# Altium PCB B.PcbDoc
Units mm, origin at the board's own origin, x right, y up, seen from the top; angles counter-clockwise.
Board outline 93 x 32 mm, 2 copper layers (Top Layer, Bottom Layer); 2 components, 64 nets, 128 pads, 0 vias.
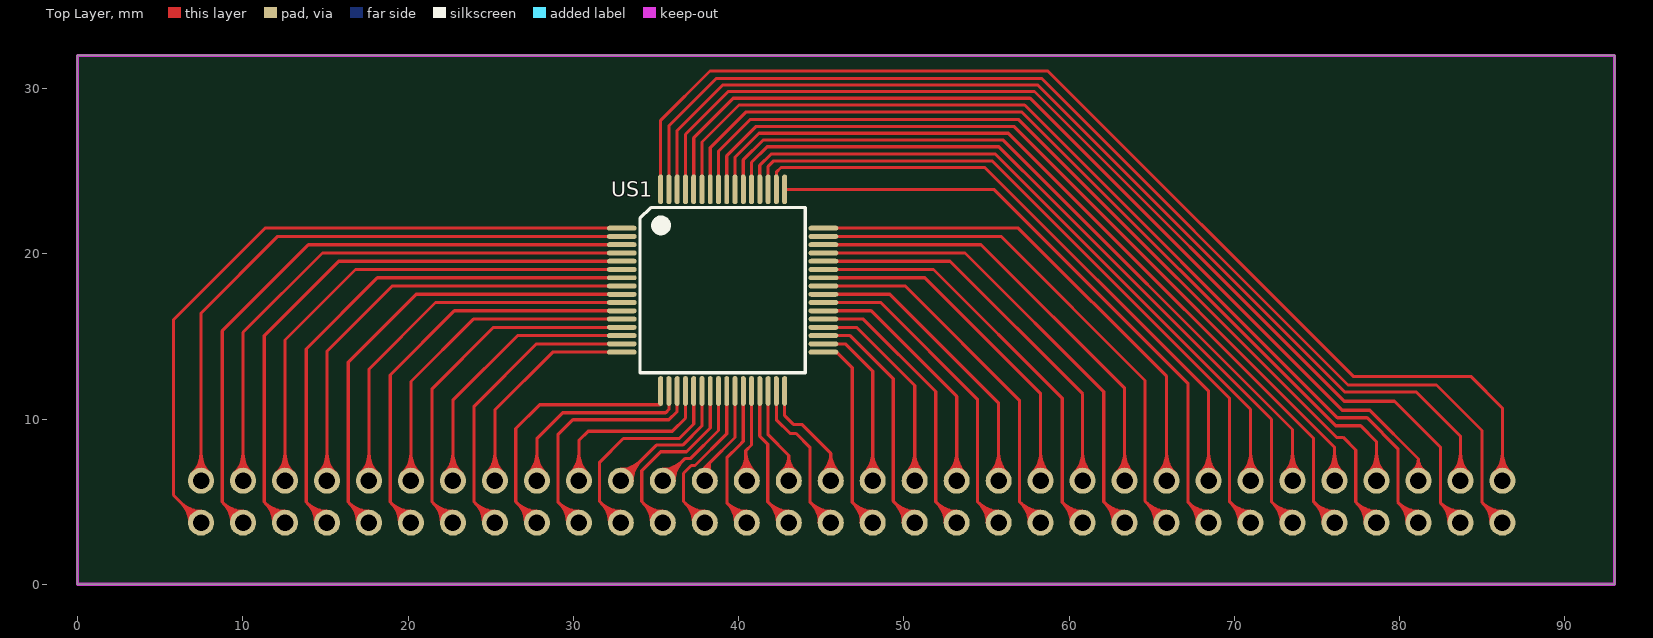
[diagram p0: Top Layer view]
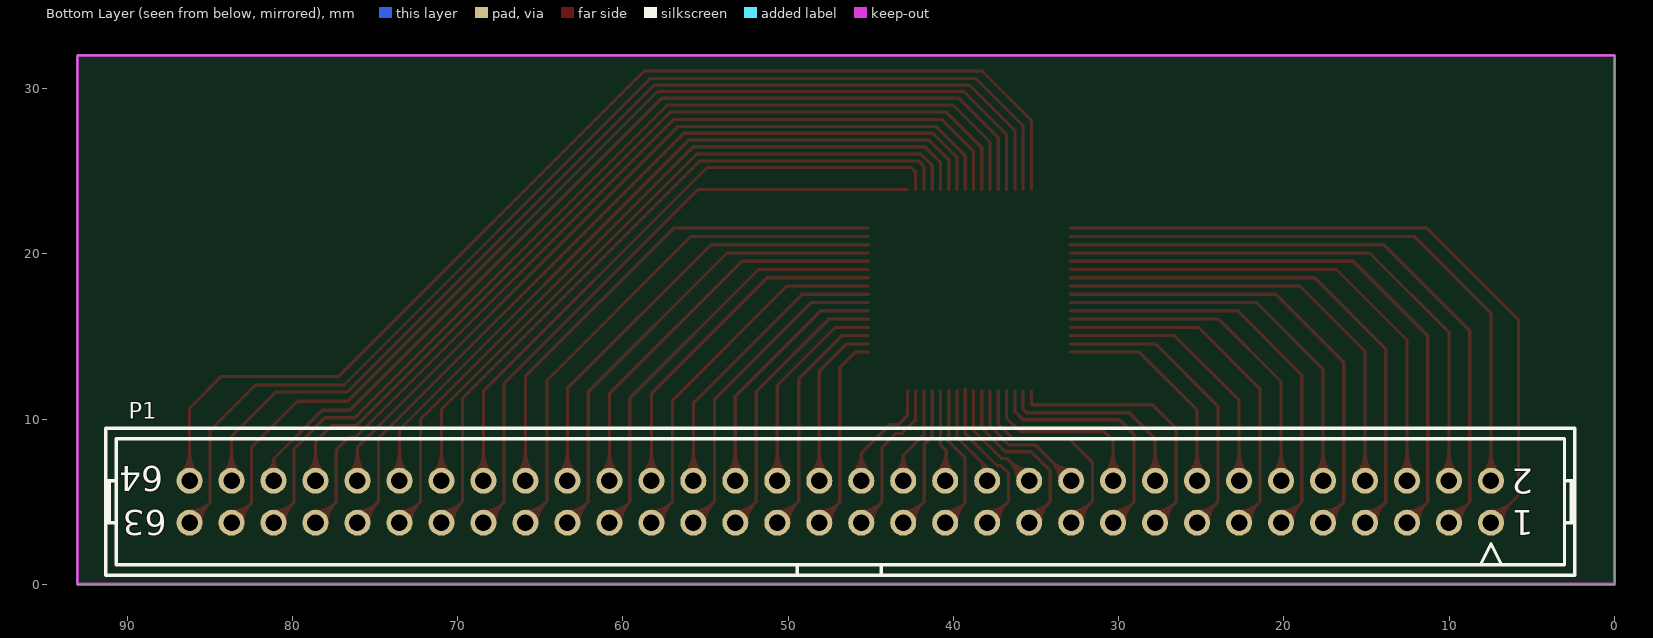
[diagram p1: Bottom Layer view, seen from below]

## Layer stack, top to bottom
Top Layer: signal copper 0.0356
Dielectric: dielectric 0.32, FR-4, Dk 4.8
Bottom Layer: signal copper 0.0356

## Board outline
0,0 0,32 93,32 93,0

## Design rules (kind name [scope] priority, off if disabled: settings)
Clearance Clearance_1 [inpolygon] p1: gap=0.5
Clearance [All] p2: gap=0.2
MinimumSolderMaskSliver [All] p1: minsoldermaskwidth=0.01
PolygonConnect PolygonConnect_1 [isvia] p1: connectstyle=Direct reliefconductorwidth=0.254 reliefentries=4 polygonreliefangle="90 Angle"
PolygonConnect [All] p2: connectstyle=Relief reliefconductorwidth=0.254 reliefentries=4 polygonreliefangle="90 Angle"
RoutingVias [All] p1: holewidth=0.3 width=0.66 viastyle="Through Hole" minholewidth=0.3 minwidth=0.66 maxholewidth=0.3 maxwidth=0.66
SilkToSilkClearance [All] p1: silktosilkclearance=0.01
SilkscreenOverComponentPads [All] p1: minsilkscreentomaskgap=0.01
SolderMaskExpansion [All] p1: expansion=0.102
Width [All] p1: maxlimit=1 minlimit=0.15 preferedwidth=0.254 minimp=50.000000 maximp=50.000000 favimp=50.000000
25 further rules are at their usual default settings.

## Components (designator, comment, footprint, x,y, rotation, side; value= is the part's Value field where it differs from the comment)
P1 "64" 64-1 46.847,5 r0 bottom locked
US1 "64" TQFP64 39.036,17.8 r0 top locked

## Footprints (in the part's own frame and the unit in brackets; to place one, negate y for a bottom-side part, rotate by r counter-clockwise, add the part's x,y. Pads: shape width x height; smd on the part's side, far side on the other; paste and mask are expansions set on the pad)
64-1 [mil]
  round 62 hole 39.37: 1(-1550,50) 2(-1550,-50) 3(-1450,50) 4(-1450,-50) 5(-1350,50) 6(-1350,-50) 7(-1250,50) 8(-1250,-50) 9(-1150,50) 10(-1150,-50) 11(-1050,50) 12(-1050,-50) 13(-950,50) 14(-950,-50) 15(-850,50) 16(-850,-50) 17(-750,50) 18(-750,-50) 19(-650,50) 20(-650,-50) 21(-550,50) 22(-550,-50) 23(-450,50) 24(-450,-50) 25(-350,50) 26(-350,-50) 27(-250,50) 28(-250,-50) 29(-150,50) 30(-150,-50) 31(-50,50) 32(-50,-50) 33(50,50) 34(50,-50) 35(150,50) 36(150,-50) 37(250,50) 38(250,-50) 39(350,50) 40(350,-50) 41(450,50) 42(450,-50) 43(550,50) 44(550,-50) 45(650,50) 46(650,-50) 47(750,50) 48(750,-50) 49(850,50) 50(850,-50) 51(950,50) 52(950,-50) 53(1050,50) 54(1050,-50) 55(1150,50) 56(1150,-50) 57(1250,50) 58(1250,-50) 59(1350,50) 60(1350,-50) 61(1450,50) 62(1450,-50) 63(1550,50) 64(1550,-50)
  silkscreen extent -1750,-175 1750,175
TQFP64 [mm]
  oval 1.8x0.3 smd mask+0.05: 1(-6.1,3.75) 2(-6.1,3.25) 3(-6.1,2.75) 4(-6.1,2.25) 5(-6.1,1.75) 6(-6.1,1.25) 7(-6.1,0.75) 8(-6.1,0.25) 9(-6.1,-0.25) 10(-6.1,-0.75) 11(-6.1,-1.25) 12(-6.1,-1.75) 13(-6.1,-2.25) 14(-6.1,-2.75) 15(-6.1,-3.25) 16(-6.1,-3.75) 33(6.1,-3.75) 34(6.1,-3.25) 35(6.1,-2.75) 36(6.1,-2.25) 37(6.1,-1.75) 38(6.1,-1.25) 39(6.1,-0.75) 40(6.1,-0.25) 41(6.1,0.25) 42(6.1,0.75) 43(6.1,1.25) 44(6.1,1.75) 45(6.1,2.25) 46(6.1,2.75) 47(6.1,3.25) 48(6.1,3.75)
  oval 0.3x1.8 smd mask+0.05: 17(-3.75,-6.1) 18(-3.25,-6.1) 19(-2.75,-6.1) 20(-2.25,-6.1) 21(-1.75,-6.1) 22(-1.25,-6.1) 23(-0.75,-6.1) 24(-0.25,-6.1) 25(0.25,-6.1) 26(0.75,-6.1) 27(1.25,-6.1) 28(1.75,-6.1) 29(2.25,-6.1) 30(2.75,-6.1) 31(3.25,-6.1) 32(3.75,-6.1) 49(3.75,6.1) 50(3.25,6.1) 51(2.75,6.1) 52(2.25,6.1) 53(1.75,6.1) 54(1.25,6.1) 55(0.75,6.1) 56(0.25,6.1) 57(-0.25,6.1) 58(-0.75,6.1) 59(-1.25,6.1) 60(-1.75,6.1) 61(-2.25,6.1) 62(-2.75,6.1) 63(-3.25,6.1) 64(-3.75,6.1)
  silkscreen extent -5,-5 5,5

## Nets (pads, with @x,y where several pads share a name; then routed paths per layer and width w, separated by ;. In a path a pad name is that pad's centre, name@x,y a point inside that pad or via, vN(x,y) a via of type N, cw(c..) or ccw(c..) an arc to the next point about the centre after c; other vN are vias at no path point)
1: P1.1 US1.1 | length 46.9
  Top Layer w0.19: P1.1@6.785,3.73 ccw(c5.113,3.73) 6.295,4.912 ccw(c7.477,6.094) P1.1@7.477,4.422 ; P1.1@6.975,3.73 ccw(c5.762,3.73) 6.62,4.588 ccw(c7.477,5.445) P1.1@7.477,4.232 ; P1.1 5.808,5.399 5.808,16.007 11.351,21.55 US1.1
2: P1.2 US1.2 | length 42
  Top Layer w0.19: P1.2@6.988,6.76 ccw(c5.806,7.942) 7.477,7.942 ccw(c9.149,7.942) P1.2@7.967,6.76 ; P1.2@7.122,6.625 ccw(c6.264,7.483) 7.477,7.483 ccw(c8.69,7.483) P1.2@7.833,6.625 ; P1.2 7.477,16.407 12.121,21.05 US1.2
3: P1.3 US1.3 | length 43
  Top Layer w0.19: P1.3@9.325,3.73 ccw(c7.653,3.73) 8.835,4.912 ccw(c10.017,6.094) P1.3@10.017,4.422 ; P1.3@9.515,3.73 ccw(c8.302,3.73) 9.16,4.588 ccw(c10.017,5.445) P1.3@10.017,4.232 ; P1.3 8.761,4.986 8.761,15.337 13.975,20.55 US1.3
4: P1.4 US1.4 | length 38.4
  Top Layer w0.19: P1.4@9.528,6.76 ccw(c8.346,7.942) 10.017,7.942 ccw(c11.689,7.942) P1.4@10.507,6.76 ; P1.4@9.662,6.625 ccw(c8.804,7.483) 10.017,7.483 ccw(c11.23,7.483) P1.4@10.373,6.625 ; P1.4 10.017,15.243 14.824,20.05 US1.4
5: P1.5 US1.5 | length 39.9
  Top Layer w0.19: P1.5@11.865,3.73 ccw(c10.193,3.73) 11.375,4.912 ccw(c12.557,6.094) P1.5@12.557,4.422 ; P1.5@12.055,3.73 ccw(c10.842,3.73) 11.7,4.588 ccw(c12.557,5.445) P1.5@12.557,4.232 ; P1.5 11.301,4.986 11.301,15.049 15.802,19.55 US1.5
6: P1.6 US1.6 | length 35.2
  Top Layer w0.19: P1.6@12.068,6.76 ccw(c10.886,7.942) 12.557,7.942 ccw(c14.229,7.942) P1.6@13.047,6.76 ; P1.6@12.202,6.625 ccw(c11.344,7.483) 12.557,7.483 ccw(c13.77,7.483) P1.6@12.913,6.625 ; P1.6 12.557,14.781 16.826,19.05 US1.6
7: P1.7 US1.7 | length 36.4
  Top Layer w0.19: P1.7@14.405,3.73 ccw(c12.733,3.73) 13.915,4.912 ccw(c15.097,6.094) P1.7@15.097,4.422 ; P1.7@14.595,3.73 ccw(c13.382,3.73) 14.24,4.588 ccw(c15.097,5.445) P1.7@15.097,4.232 ; P1.7 13.841,4.986 13.841,14.243 18.148,18.55 US1.7
8: P1.8 US1.8 | length 31.8
  Top Layer w0.19: P1.8@14.608,6.76 ccw(c13.426,7.942) 15.097,7.942 ccw(c16.769,7.942) P1.8@15.587,6.76 ; P1.8@14.742,6.625 ccw(c13.884,7.483) 15.097,7.483 ccw(c16.31,7.483) P1.8@15.453,6.625 ; P1.8 15.097,14.101 19.046,18.05 US1.8
9: P1.9 US1.9 | length 33
  Top Layer w0.19: P1.9@16.945,3.73 ccw(c15.273,3.73) 16.455,4.912 ccw(c17.637,6.094) P1.9@17.637,4.422 ; P1.9@17.135,3.73 ccw(c15.922,3.73) 16.78,4.588 ccw(c17.637,5.445) P1.9@17.637,4.232 ; P1.9 16.381,4.986 16.381,13.438 20.494,17.55 US1.9
10: P1.10 US1.10 | length 28.2
  Top Layer w0.19: P1.10@17.148,6.76 ccw(c15.966,7.942) 17.637,7.942 ccw(c19.309,7.942) P1.10@18.127,6.76 ; P1.10@17.282,6.625 ccw(c16.424,7.483) 17.637,7.483 ccw(c18.85,7.483) P1.10@17.993,6.625 ; P1.10 17.637,13.021 21.666,17.05 US1.10
11: P1.11 US1.11 | length 29.6
  Top Layer w0.19: P1.11@19.485,3.73 ccw(c17.813,3.73) 18.995,4.912 ccw(c20.177,6.094) P1.11@20.177,4.422 ; P1.11@19.675,3.73 ccw(c18.462,3.73) 19.32,4.588 ccw(c20.177,5.445) P1.11@20.177,4.232 ; P1.11 18.921,4.986 18.921,12.666 22.805,16.55 US1.11
12: P1.12 US1.12 | length 24.9
  Top Layer w0.19: P1.12@19.688,6.76 ccw(c18.506,7.942) 20.177,7.942 ccw(c21.849,7.942) P1.12@20.667,6.76 ; P1.12@19.822,6.625 ccw(c18.964,7.483) 20.177,7.483 ccw(c21.39,7.483) P1.12@20.533,6.625 ; P1.12 20.177,12.273 23.955,16.05 US1.12
13: P1.13 US1.13 | length 26.2
  Top Layer w0.19: P1.13@22.025,3.73 ccw(c20.353,3.73) 21.535,4.912 ccw(c22.717,6.094) P1.13@22.717,4.422 ; P1.13@22.215,3.73 ccw(c21.002,3.73) 21.86,4.588 ccw(c22.717,5.445) P1.13@22.717,4.232 ; P1.13 21.461,4.986 21.461,11.838 25.173,15.55 US1.13
14: P1.14 US1.14 | length 21.2
  Top Layer w0.19: P1.14@22.228,6.76 ccw(c21.046,7.942) 22.717,7.942 ccw(c24.389,7.942) P1.14@23.207,6.76 ; P1.14@22.362,6.625 ccw(c21.504,7.483) 22.717,7.483 ccw(c23.93,7.483) P1.14@23.073,6.625 ; P1.14 22.717,11.146 26.621,15.05 US1.14
15: P1.15 US1.15 | length 22.6
  Top Layer w0.19: P1.15@24.565,3.73 ccw(c22.893,3.73) 24.075,4.912 ccw(c25.257,6.094) P1.15@25.257,4.422 ; P1.15@24.755,3.73 ccw(c23.542,3.73) 24.4,4.588 ccw(c25.257,5.445) P1.15@25.257,4.232 ; P1.15 24.001,4.986 24.001,10.78 27.771,14.55 US1.15
16: P1.16 US1.16 | length 17.9
  Top Layer w0.19: P1.16@24.768,6.76 ccw(c23.586,7.942) 25.257,7.942 ccw(c26.929,7.942) P1.16@25.747,6.76 ; P1.16@24.902,6.625 ccw(c24.044,7.483) 25.257,7.483 ccw(c26.47,7.483) P1.16@25.613,6.625 ; P1.16 25.257,10.547 28.76,14.05 US1.16
17: P1.17 US1.17 | length 20.9
  Top Layer w0.19: P1.17@27.105,3.73 ccw(c25.433,3.73) 26.615,4.912 ccw(c27.797,6.094) P1.17@27.797,4.422 ; P1.17@27.295,3.73 ccw(c26.082,3.73) 26.94,4.588 ccw(c27.797,5.445) P1.17@27.797,4.232 ; P1.17 26.522,5.006 26.522,9.428 27.962,10.868 35.235,10.868 35.286,10.918 US1.17
18: P1.18 US1.18 | length 16.9
  Top Layer w0.19: P1.18@27.308,6.76 ccw(c26.126,7.942) 27.797,7.942 ccw(c29.469,7.942) P1.18@28.287,6.76 ; P1.18@27.442,6.625 ccw(c26.584,7.483) 27.797,7.483 ccw(c29.01,7.483) P1.18@28.153,6.625 ; P1.18 27.797,8.813 29.363,10.379 35.586,10.379 35.786,10.579 US1.18
19: P1.19 US1.19 | length 19.4
  Top Layer w0.19: P1.19@29.645,3.73 ccw(c27.973,3.73) 29.155,4.912 ccw(c30.337,6.094) P1.19@30.337,4.422 ; P1.19@29.835,3.73 ccw(c28.622,3.73) 29.48,4.588 ccw(c30.337,5.445) P1.19@30.337,4.232 ; P1.19 29.066,5.001 29.066,9.047 29.978,9.958 35.786,9.958 36.286,10.458 US1.19
20: P1.20 US1.20 | length 15.6
  Top Layer w0.19: P1.20@29.848,6.76 ccw(c28.666,7.942) 30.337,7.942 ccw(c32.009,7.942) P1.20@30.827,6.76 ; P1.20@29.982,6.625 ccw(c29.124,7.483) 30.337,7.483 ccw(c31.55,7.483) P1.20@30.693,6.625 ; P1.20 30.337,8.707 30.896,9.266 35.997,9.266 36.786,10.054 US1.20
21: P1.21 US1.21 | length 17.4
  Top Layer w0.19: P1.21@32.185,3.73 ccw(c30.513,3.73) 31.695,4.912 ccw(c32.877,6.094) P1.21@32.877,4.422 ; P1.21@32.375,3.73 ccw(c31.162,3.73) 32.02,4.588 ccw(c32.877,5.445) P1.21@32.877,4.232 ; P1.21 31.596,5.011 31.596,7.391 33.029,8.824 36.407,8.824 37.286,9.702 US1.21
22: P1.22 US1.22 | length 12.9
  Top Layer w0.19: P1.22 35.028,8.421 36.613,8.421 37.786,9.594 US1.22 ; P1.22@32.877,6.772 ccw(c32.877,7.985) 33.735,7.128 ccw(c34.593,6.27) P1.22@33.38,6.27 ; P1.22@32.877,6.962 ccw(c32.877,8.634) 34.059,7.452 ccw(c35.241,6.27) P1.22@33.57,6.27
23: P1.23 US1.23 | length 15.7
  Top Layer w0.19: P1.23@34.725,3.73 ccw(c33.053,3.73) 34.235,4.912 ccw(c35.417,6.094) P1.23@35.417,4.422 ; P1.23@34.915,3.73 ccw(c33.702,3.73) 34.56,4.588 ccw(c35.417,5.445) P1.23@35.417,4.232 ; P1.23 34.138,5.009 34.138,6.874 35.286,8.022 36.847,8.022 38.286,9.46 US1.23
24: P1.24 US1.24 | length 11.5
  Top Layer w0.19: P1.24 36.755,7.607 37.083,7.607 38.786,9.31 US1.24 ; P1.24@35.417,6.772 ccw(c35.417,7.985) 36.275,7.128 ccw(c37.133,6.27) P1.24@35.92,6.27 ; P1.24@35.417,6.962 ccw(c35.417,8.634) 36.599,7.452 ccw(c37.781,6.27) P1.24@36.11,6.27
25: P1.25 US1.25 | length 14.5
  Top Layer w0.19: P1.25@37.265,3.73 ccw(c35.593,3.73) 36.775,4.912 ccw(c37.957,6.094) P1.25@37.957,4.422 ; P1.25@37.455,3.73 ccw(c36.242,3.73) 37.1,4.588 ccw(c37.957,5.445) P1.25@37.957,4.232 ; P1.25 36.672,5.015 36.672,6.713 37.146,7.188 37.364,7.188 39.284,9.108 39.284,11.846 39.286,11.844 US1.25
26: P1.26 US1.26 | length 8.5
  Top Layer w0.19: P1.26@37.868,6.957 ccw(c37.854,7.059) 37.957,7.059 ; P1.26@38.047,6.957 cw(c38.06,7.059) 37.957,7.059 ; US1.26 39.786,8.887 38.247,7.348 ; 37.957,7.059 P1.26 P1.26@38.113,6.426 ; 37.957,7.059 38.113,7.215 ; P1.26@38.113,6.426 38.113,7.215 ; P1.26@38.113,6.426 38.247,6.559 38.247,7.348 ; 38.113,7.215 38.247,7.348
27: P1.27 US1.27 | length 13.4
  Top Layer w0.19: P1.27@39.805,3.73 ccw(c38.133,3.73) 39.315,4.912 ccw(c40.497,6.094) P1.27@40.497,4.422 ; P1.27@39.995,3.73 ccw(c38.782,3.73) 39.64,4.588 ccw(c40.497,5.445) P1.27@40.497,4.232 ; US1.27 40.286,8.65 40.036,8.4 39.296,7.66 39.296,4.931 P1.27
28: P1.28 US1.28 | length 10.9
  Top Layer w0.19: P1.28@40.008,6.76 ccw(c38.974,7.793) 40.436,7.793 ; P1.28@40.142,6.625 ccw(c39.433,7.334) 40.436,7.334 ; 40.436,7.173 ccw(c41.4,7.173) P1.28@40.718,6.491 ; 40.436,7.632 ccw(c41.859,7.632) P1.28@40.853,6.625 ; 40.436,8.09 ccw(c42.318,8.09) P1.28@40.987,6.76 ; P1.28 40.436,6.332 40.436,8.079 40.786,8.429 US1.28
29: P1.29 US1.29 | length 13.2
  Top Layer w0.19: US1.29 41.286,8.967 41.767,8.486 41.767,5.001 P1.29 ; P1.29@42.345,3.73 ccw(c40.673,3.73) 41.855,4.912 ccw(c43.037,6.094) P1.29@43.037,4.422 ; P1.29@42.535,3.73 ccw(c41.322,3.73) 42.18,4.588 ccw(c43.037,5.445) P1.29@43.037,4.232
30: P1.30 US1.30 | length 9.9
  Top Layer w0.19: US1.30 41.786,9.048 43.037,7.796 ; P1.30@42.581,6.791 ccw(c41.702,7.796) 43.037,7.796 ; P1.30@42.706,6.648 ccw(c42.068,7.377) 43.037,7.377 ccw(c44.006,7.377) P1.30@43.368,6.648 ; P1.30 43.037,7.796 ; P1.30@43.493,6.791 cw(c44.372,7.796) 43.037,7.796
31: P1.31 US1.31 | length 14.1
  Top Layer w0.19: US1.31 42.286,9.96 43.119,9.127 43.482,9.127 44.312,8.297 44.312,4.995 P1.31 ; P1.31@44.885,3.73 ccw(c43.213,3.73) 44.395,4.912 ccw(c45.577,6.094) P1.31@45.577,4.422 ; P1.31@45.075,3.73 ccw(c43.862,3.73) 44.72,4.588 ccw(c45.577,5.445) P1.31@45.577,4.232
32: P1.32 US1.32 | length 11.3
  Top Layer w0.19: US1.32 42.786,10.208 43.313,9.681 43.819,9.681 45.577,7.923 ; P1.32@45.092,6.764 ccw(c43.951,7.923) 45.577,7.923 ; P1.32@45.225,6.628 ccw(c44.398,7.469) 45.577,7.469 ccw(c46.757,7.469) P1.32@45.93,6.628 ; P1.32 45.577,7.923 ; P1.32@46.063,6.764 cw(c47.203,7.923) 45.577,7.923
33: P1.33 US1.33 | length 16.6
  Top Layer w0.19: US1.33 45.944,14.05 46.882,13.112 46.882,4.966 P1.33 ; P1.33@47.425,3.73 ccw(c45.753,3.73) 46.935,4.912 ccw(c48.117,6.094) P1.33@48.117,4.422 ; P1.33@47.615,3.73 ccw(c46.402,3.73) 47.26,4.588 ccw(c48.117,5.445) P1.33@48.117,4.232
34: P1.34 US1.34 | length 14.8
  Top Layer w0.19: US1.34 46.464,14.55 48.117,12.897 P1.34 ; P1.34@47.628,6.76 ccw(c46.446,7.942) 48.117,7.942 ccw(c49.789,7.942) P1.34@48.607,6.76 ; P1.34@47.762,6.625 ccw(c46.904,7.483) 48.117,7.483 ccw(c49.33,7.483) P1.34@48.473,6.625
35: P1.35 US1.35 | length 19.1
  Top Layer w0.19: US1.35 46.751,15.05 49.355,12.446 49.355,5.032 P1.35 ; P1.35@49.965,3.73 ccw(c48.293,3.73) 49.475,4.912 ccw(c50.657,6.094) P1.35@50.657,4.422 ; P1.35@50.155,3.73 ccw(c48.942,3.73) 49.8,4.588 ccw(c50.657,5.445) P1.35@50.657,4.232
36: P1.36 US1.36 | length 17.3
  Top Layer w0.19: US1.36 47.138,15.55 50.657,12.031 P1.36 ; P1.36@50.168,6.76 ccw(c48.986,7.942) 50.657,7.942 ccw(c52.329,7.942) P1.36@51.147,6.76 ; P1.36@50.302,6.625 ccw(c49.444,7.483) 50.657,7.483 ccw(c51.87,7.483) P1.36@51.013,6.625
37: P1.37 US1.37 | length 21.6
  Top Layer w0.19: US1.37 47.547,16.05 51.933,11.664 51.933,4.994 P1.37 ; P1.37@52.505,3.73 ccw(c50.833,3.73) 52.015,4.912 ccw(c53.197,6.094) P1.37@53.197,4.422 ; P1.37@52.695,3.73 ccw(c51.482,3.73) 52.34,4.588 ccw(c53.197,5.445) P1.37@53.197,4.232
38: P1.38 US1.38 | length 19.8
  Top Layer w0.19: US1.38 48.023,16.55 53.197,11.375 P1.38 ; P1.38@52.708,6.76 ccw(c51.526,7.942) 53.197,7.942 ccw(c54.869,7.942) P1.38@53.687,6.76 ; P1.38@52.842,6.625 ccw(c51.984,7.483) 53.197,7.483 ccw(c54.41,7.483) P1.38@53.553,6.625
39: P1.39 US1.39 | length 24.3
  Top Layer w0.19: US1.39 48.609,17.05 54.452,11.207 54.452,5.015 P1.39 ; P1.39@55.045,3.73 ccw(c53.373,3.73) 54.555,4.912 ccw(c55.737,6.094) P1.39@55.737,4.422 ; P1.39@55.235,3.73 ccw(c54.022,3.73) 54.88,4.588 ccw(c55.737,5.445) P1.39@55.737,4.232
40: P1.40 US1.40 | length 22.6
  Top Layer w0.19: US1.40 49.151,17.55 55.737,10.964 P1.40 ; P1.40@55.248,6.76 ccw(c54.066,7.942) 55.737,7.942 ccw(c57.409,7.942) P1.40@56.227,6.76 ; P1.40@55.382,6.625 ccw(c54.524,7.483) 55.737,7.483 ccw(c56.95,7.483) P1.40@56.093,6.625
41: P1.41 US1.41 | length 27.2
  Top Layer w0.19: US1.41 50.092,18.05 56.993,11.149 56.993,5.014 P1.41 ; P1.41@57.585,3.73 ccw(c55.913,3.73) 57.095,4.912 ccw(c58.277,6.094) P1.41@58.277,4.422 ; P1.41@57.775,3.73 ccw(c56.562,3.73) 57.42,4.588 ccw(c58.277,5.445) P1.41@58.277,4.232
42: P1.42 US1.42 | length 25.8
  Top Layer w0.19: US1.42 51.266,18.55 58.277,11.539 P1.42 ; P1.42@57.788,6.76 ccw(c56.606,7.942) 58.277,7.942 ccw(c59.949,7.942) P1.42@58.767,6.76 ; P1.42@57.922,6.625 ccw(c57.064,7.483) 58.277,7.483 ccw(c59.49,7.483) P1.42@58.633,6.625
43: P1.43 US1.43 | length 30.2
  Top Layer w0.19: US1.43 51.794,19.05 59.585,11.259 59.585,4.962 P1.43 ; P1.43@60.125,3.73 ccw(c58.453,3.73) 59.635,4.912 ccw(c60.817,6.094) P1.43@60.817,4.422 ; P1.43@60.315,3.73 ccw(c59.102,3.73) 59.96,4.588 ccw(c60.817,5.445) P1.43@60.817,4.232
44: P1.44 US1.44 | length 28.8
  Top Layer w0.19: US1.44 52.792,19.55 60.817,11.525 P1.44 ; P1.44@60.328,6.76 ccw(c59.146,7.942) 60.817,7.942 ccw(c62.489,7.942) P1.44@61.307,6.76 ; P1.44@60.462,6.625 ccw(c59.604,7.483) 60.817,7.483 ccw(c62.03,7.483) P1.44@61.173,6.625
45: P1.45 US1.45 | length 33.4
  Top Layer w0.19: US1.45 53.702,20.05 62.097,11.655 62.097,4.99 P1.45 ; P1.45@62.665,3.73 ccw(c60.993,3.73) 62.175,4.912 ccw(c63.357,6.094) P1.45@63.357,4.422 ; P1.45@62.855,3.73 ccw(c61.642,3.73) 62.5,4.588 ccw(c63.357,5.445) P1.45@63.357,4.232
46: P1.46 US1.46 | length 31.9
  Top Layer w0.19: US1.46 54.671,20.55 63.357,11.864 P1.46 ; P1.46@62.868,6.76 ccw(c61.686,7.942) 63.357,7.942 ccw(c65.029,7.942) P1.46@63.847,6.76 ; P1.46@63.002,6.625 ccw(c62.144,7.483) 63.357,7.483 ccw(c64.57,7.483) P1.46@63.713,6.625
47: P1.47 US1.47 | length 36.7
  Top Layer w0.19: US1.47 55.875,21.05 64.594,12.331 64.594,5.033 P1.47 ; P1.47@65.205,3.73 ccw(c63.533,3.73) 64.715,4.912 ccw(c65.897,6.094) P1.47@65.897,4.422 ; P1.47@65.395,3.73 ccw(c64.182,3.73) 65.04,4.588 ccw(c65.897,5.445) P1.47@65.897,4.232
48: P1.48 US1.48 | length 35.3
  Top Layer w0.19: US1.48 56.932,21.55 65.897,12.585 P1.48 ; P1.48@65.408,6.76 ccw(c64.226,7.942) 65.897,7.942 ccw(c67.569,7.942) P1.48@66.387,6.76 ; P1.48@65.542,6.625 ccw(c64.684,7.483) 65.897,7.483 ccw(c67.11,7.483) P1.48@66.253,6.625
49: P1.49 US1.49 | length 42.7
  Top Layer w0.19: US1.49 55.444,23.9 67.2,12.144 67.2,4.968 P1.49 ; P1.49@67.745,3.73 ccw(c66.073,3.73) 67.255,4.912 ccw(c68.437,6.094) P1.49@68.437,4.422 ; P1.49@67.935,3.73 ccw(c66.722,3.73) 67.58,4.588 ccw(c68.437,5.445) P1.49@68.437,4.232
50: P1.50 US1.50 | length 42.9
  Top Layer w0.19: US1.50 42.286,24.938 42.57,25.223 54.901,25.223 68.437,11.686 P1.50 ; P1.50@67.948,6.76 ccw(c66.766,7.942) 68.437,7.942 ccw(c70.109,7.942) P1.50@68.927,6.76 ; P1.50@68.082,6.625 ccw(c67.224,7.483) 68.437,7.483 ccw(c69.65,7.483) P1.50@68.793,6.625
51: P1.51 US1.51 | length 48
  Top Layer w0.19: US1.51 41.786,25.286 42.121,25.622 55.332,25.622 69.707,11.246 69.707,5 P1.51 ; P1.51@70.285,3.73 ccw(c68.613,3.73) 69.795,4.912 ccw(c70.977,6.094) P1.51@70.977,4.422 ; P1.51@70.475,3.73 ccw(c69.262,3.73) 70.12,4.588 ccw(c70.977,5.445) P1.51@70.977,4.232
52: P1.52 US1.52 | length 46.7
  Top Layer w0.19: US1.52 41.286,25.351 41.972,26.037 55.526,26.037 70.977,10.586 P1.52 ; P1.52@70.488,6.76 ccw(c69.306,7.942) 70.977,7.942 ccw(c72.649,7.942) P1.52@71.467,6.76 ; P1.52@70.622,6.625 ccw(c69.764,7.483) 70.977,7.483 ccw(c72.19,7.483) P1.52@71.333,6.625
53: P1.53 US1.53 | length 51.6
  Top Layer w0.19: US1.53 40.786,25.533 41.728,26.475 55.75,26.475 58.785,23.44 72.246,9.979 72.246,5.001 P1.53 ; P1.53@72.825,3.73 ccw(c71.153,3.73) 72.335,4.912 ccw(c73.517,6.094) P1.53@73.517,4.422 ; P1.53@73.015,3.73 ccw(c71.802,3.73) 72.66,4.588 ccw(c73.517,5.445) P1.53@73.517,4.232
54: P1.54 US1.54 | length 50.4
  Top Layer w0.19: US1.54 40.286,25.681 41.478,26.874 56.011,26.874 73.517,9.368 P1.54 ; P1.54@73.028,6.76 ccw(c71.846,7.942) 73.517,7.942 ccw(c75.189,7.942) P1.54@74.007,6.76 ; P1.54@73.162,6.625 ccw(c72.304,7.483) 73.517,7.483 ccw(c74.73,7.483) P1.54@73.873,6.625
55: P1.55 US1.55 | length 55.4
  Top Layer w0.19: US1.55 39.786,25.847 41.234,27.295 56.319,27.295 59.28,24.335 74.791,8.823 74.791,4.996 P1.55 ; P1.55@75.365,3.73 ccw(c73.693,3.73) 74.875,4.912 ccw(c76.057,6.094) P1.55@76.057,4.422 ; P1.55@75.555,3.73 ccw(c74.342,3.73) 75.2,4.588 ccw(c76.057,5.445) P1.55@76.057,4.232
56: P1.56 US1.56 | length 54.1
  Top Layer w0.19: US1.56 39.286,25.923 41.068,27.706 56.654,27.706 59.675,24.685 76.057,8.302 P1.56 ; P1.56@75.568,6.76 ccw(c74.386,7.942) 76.057,7.942 ccw(c77.729,7.942) P1.56@76.547,6.76 ; P1.56@75.702,6.625 ccw(c74.844,7.483) 76.057,7.483 ccw(c77.27,7.483) P1.56@76.413,6.625
57: P1.57 US1.57 | length 59.4
  Top Layer w0.19: US1.57 38.786,26.21 40.691,28.116 56.956,28.116 76.181,8.891 76.579,8.891 77.342,8.128 77.342,4.986 P1.57 ; P1.57@77.905,3.73 ccw(c76.233,3.73) 77.415,4.912 ccw(c78.597,6.094) P1.57@78.597,4.422 ; P1.57@78.095,3.73 ccw(c76.882,3.73) 77.74,4.588 ccw(c78.597,5.445) P1.57@78.597,4.232
58: P1.58 US1.58 | length 58.9
  Top Layer w0.19: US1.58 38.286,26.419 40.436,28.57 57.145,28.57 76.121,9.594 77.638,9.594 78.597,8.635 P1.58 ; P1.58@78.108,6.76 ccw(c76.926,7.942) 78.597,7.942 ccw(c80.269,7.942) P1.58@79.087,6.76 ; P1.58@78.242,6.625 ccw(c77.384,7.483) 78.597,7.483 ccw(c79.81,7.483) P1.58@78.953,6.625
59: P1.59 US1.59 | length 64
  Top Layer w0.19: US1.59 37.786,26.762 40.026,29.003 57.306,29.003 76.232,10.077 78.028,10.077 79.892,8.213 79.892,4.975 P1.59 ; P1.59@80.445,3.73 ccw(c78.773,3.73) 79.955,4.912 ccw(c81.137,6.094) P1.59@81.137,4.422 ; P1.59@80.635,3.73 ccw(c79.422,3.73) 80.28,4.588 ccw(c81.137,5.445) P1.59@81.137,4.232
60: P1.60 US1.60 | length 61.3
  Top Layer w0.19: US1.60 37.286,27.016 39.682,29.412 57.642,29.412 76.52,10.535 78.189,10.535 81.137,7.586 ; P1.60@80.745,6.841 ccw(c80.233,7.586) 81.137,7.586 ; P1.60@80.853,6.684 ccw(c80.481,7.225) 81.137,7.225 ccw(c81.794,7.225) P1.60@81.422,6.684 ; P1.60 81.137,7.586 ; P1.60@81.529,6.841 cw(c82.042,7.586) 81.137,7.586
61: P1.61 US1.61 | length 68.6
  Top Layer w0.19: US1.61 36.786,27.225 39.378,29.817 57.906,29.817 76.646,11.077 79.688,11.077 82.467,8.298 82.467,4.94 P1.61 ; P1.61@82.985,3.73 ccw(c81.313,3.73) 82.495,4.912 ccw(c83.677,6.094) P1.61@83.677,4.422 ; P1.61@83.175,3.73 ccw(c81.962,3.73) 82.82,4.588 ccw(c83.677,5.445) P1.61@83.677,4.232
62: P1.62 US1.62 | length 68.1
  Top Layer w0.19: US1.62 36.286,27.457 39.04,30.211 58.106,30.211 76.689,11.628 81.019,11.628 83.677,8.969 P1.62 ; P1.62@83.188,6.76 ccw(c82.006,7.942) 83.677,7.942 ccw(c85.349,7.942) P1.62@84.167,6.76 ; P1.62@83.322,6.625 ccw(c82.464,7.483) 83.677,7.483 ccw(c84.89,7.483) P1.62@84.033,6.625
63: P1.63 US1.63 | length 73.7
  Top Layer w0.19: US1.63 35.786,27.733 38.663,30.61 58.325,30.61 76.875,12.06 82.23,12.06 84.984,9.306 84.984,4.963 P1.63 ; P1.63@85.525,3.73 ccw(c83.853,3.73) 85.035,4.912 ccw(c86.217,6.094) P1.63@86.217,4.422 ; P1.63@85.715,3.73 ccw(c84.502,3.73) 85.36,4.588 ccw(c86.217,5.445) P1.63@86.217,4.232
64: P1.64 US1.64 | length 73.7
  Top Layer w0.19: US1.64 35.286,28.075 38.269,31.059 58.707,31.059 77.181,12.585 84.298,12.585 86.217,10.665 P1.64 ; P1.64@85.728,6.76 ccw(c84.546,7.942) 86.217,7.942 ccw(c87.889,7.942) P1.64@86.707,6.76 ; P1.64@85.862,6.625 ccw(c85.004,7.483) 86.217,7.483 ccw(c87.43,7.483) P1.64@86.573,6.625

## Keep-outs
Keep-Out Layer:
  the board outline again, w0.203

## Text inside footprints (layer, text, board x,y; h text height)
P1: Bottom Overlay "1" at 4.889,4.496 h1.52 r180; Bottom Overlay "2" at 4.928,6.998 h1.52 r180; Bottom Overlay "63" at 87.597,4.476 h1.52 r180